# EAGLE board Circuito (EAGLE 7.6.0)

Size 56.82 x 53.33 mm. Coordinates in mm from the lower left corner, seen from the top.
Outline: 0,0 56.82,0 56.82,53.33 0,53.33 0,0
Copper layers (1*16): Top 0.035mm / dielectric 1.5mm / Bottom 0.035mm
Design rules "default": minimum track width 10mil, minimum drill 24mil, track to track 8mil, track to pad 8mil, pad to pad 8mil, via to via 8mil, smd to smd 8mil, copper to edge 40mil, drill to drill 8mil, minimum pad ring 10mil, minimum via ring 8mil, stop-mask expansion 4mil, vias tented up to drill 0mil, thermal gap 10mil

## Footprints (pad centres in the part's own frame; a part is rotated, then mirrored left to right if it is on the bottom)
DC-POWER = drill 0.889 pad 2.54 octagon: + 0,2.54; - 0,-2.54
2P-2.54-65/35MIL = drill 0.889 pad 1.651 square: 1 0,1.27 | drill 0.889 pad 1.651: 2 0,-1.27
0207/10 = drill 0.813 octagon: 1 -5.08,0; 2 5.08,0

## Placement (x,y rotation side)
Meter3  [DC-POWER]  5,86.28 0 top  (outside the outline)
Meter4  [DC-POWER]  5,98.98 0 top  (outside the outline)
P1  20V  [2P-2.54-65/35MIL]  5,60.88 0 top  (outside the outline)
P2  12V  [2P-2.54-65/35MIL]  5,73.58 0 top  (outside the outline)
R1  2.2k‎Ω  [0207/10]  5,10.08 0 top
R2  0.47k‎Ω  [0207/10]  5,22.78 0 top
R3  1k‎Ω  [0207/10]  5,35.48 0 top
R4  0.82k‎Ω  [0207/10]  5,48.18 0 top

## Library data of the parts
Meter3 Meter4 P1 P2 R1-R4 = AUTODESK_CIRCUITS_BREADBOARD

## Nets
N$1: Meter4.- R1.2 R3.2 R4.1
N$2: P1.2 R3.1
N$3: P1.1 P2.1 R1.1 R2.1
N$4: Meter3.+ Meter4.+ P2.2 R4.2
N$5: Meter3.- R2.2

## Tracks (layer width: path | path; a pad name or v marks a point on that pad's centre or on a via)
N$1  (3 unrouted)
N$2  (1 unrouted)
N$3  (3 unrouted)
N$4  (3 unrouted)
N$5  (1 unrouted)